# Altium PCB main.PcbDoc
Units mm, origin at the board's own origin, x right, y up, seen from the top; angles counter-clockwise.
Board outline 74.5 x 54 mm, 2 copper layers (Top Layer, Bottom Layer), stack 1.135 mm thick; 14 components, 9 nets, 38 pads, 2 vias.
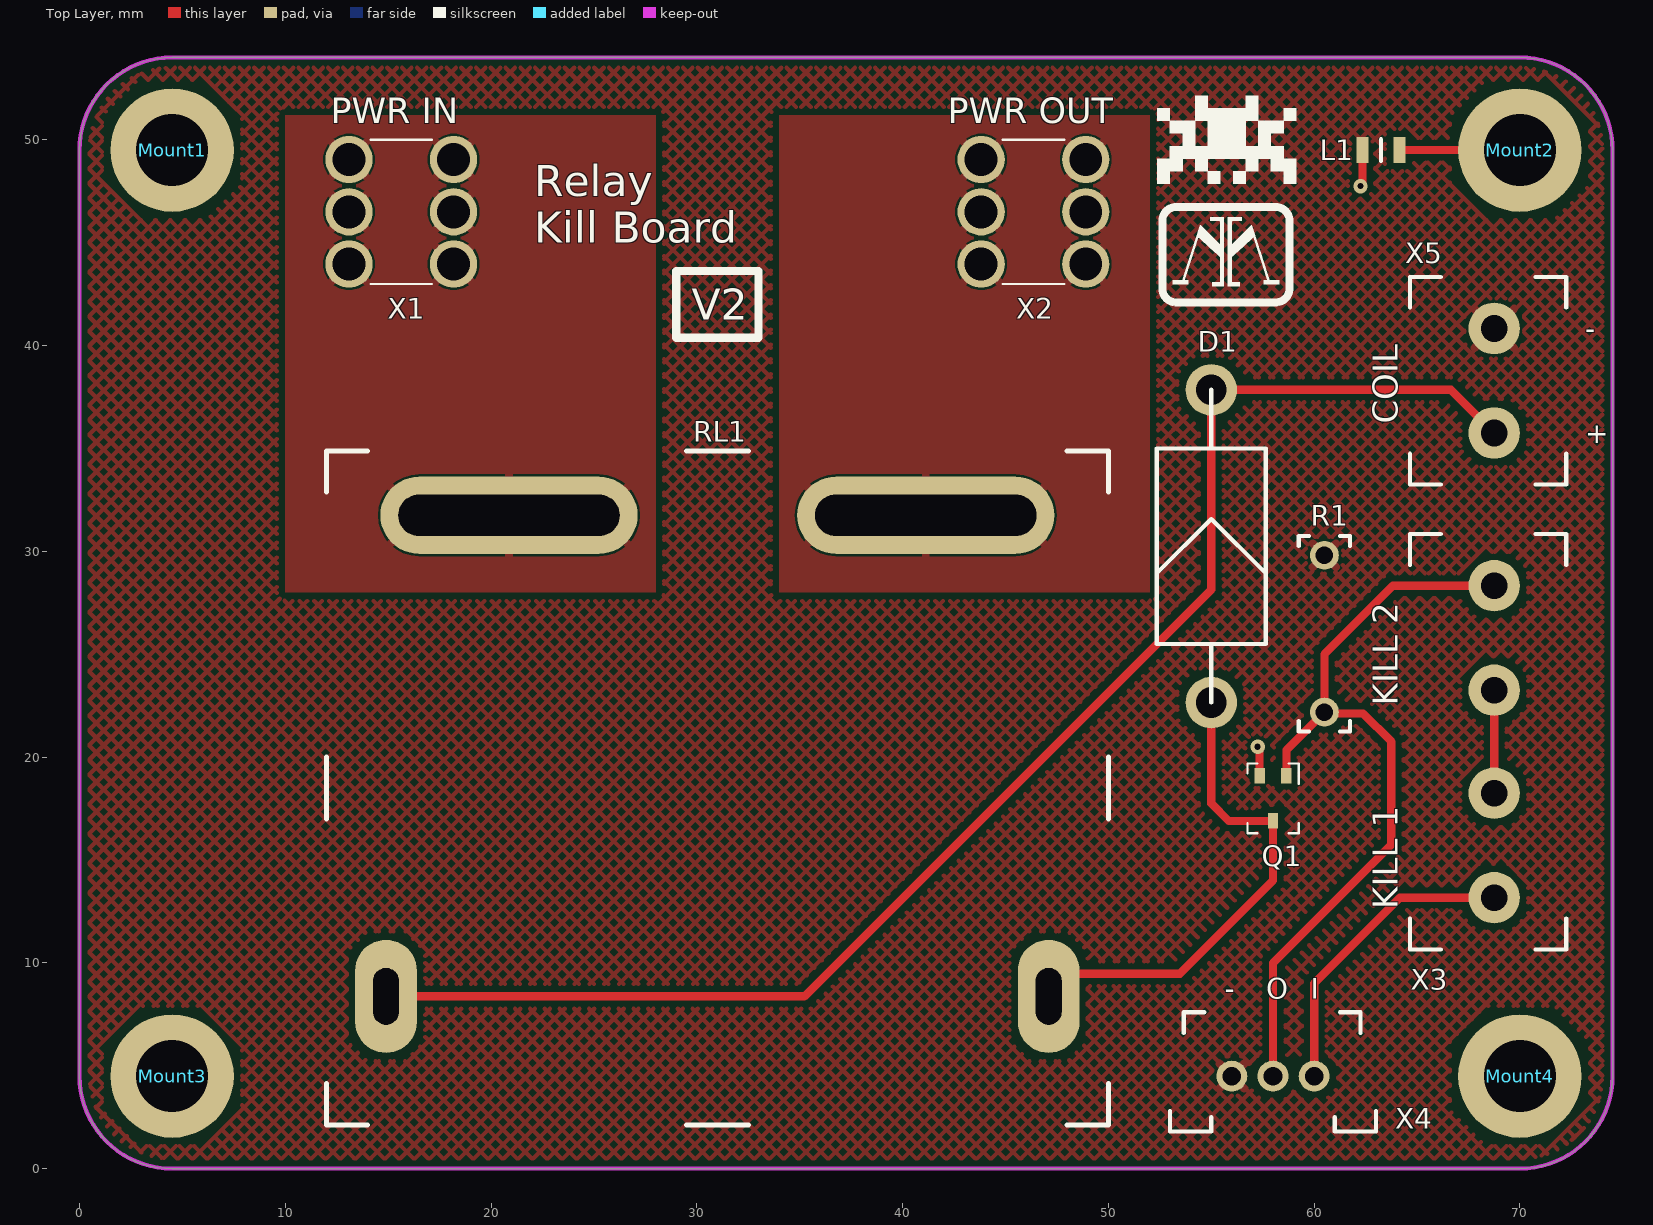
[diagram p0: Top Layer view]
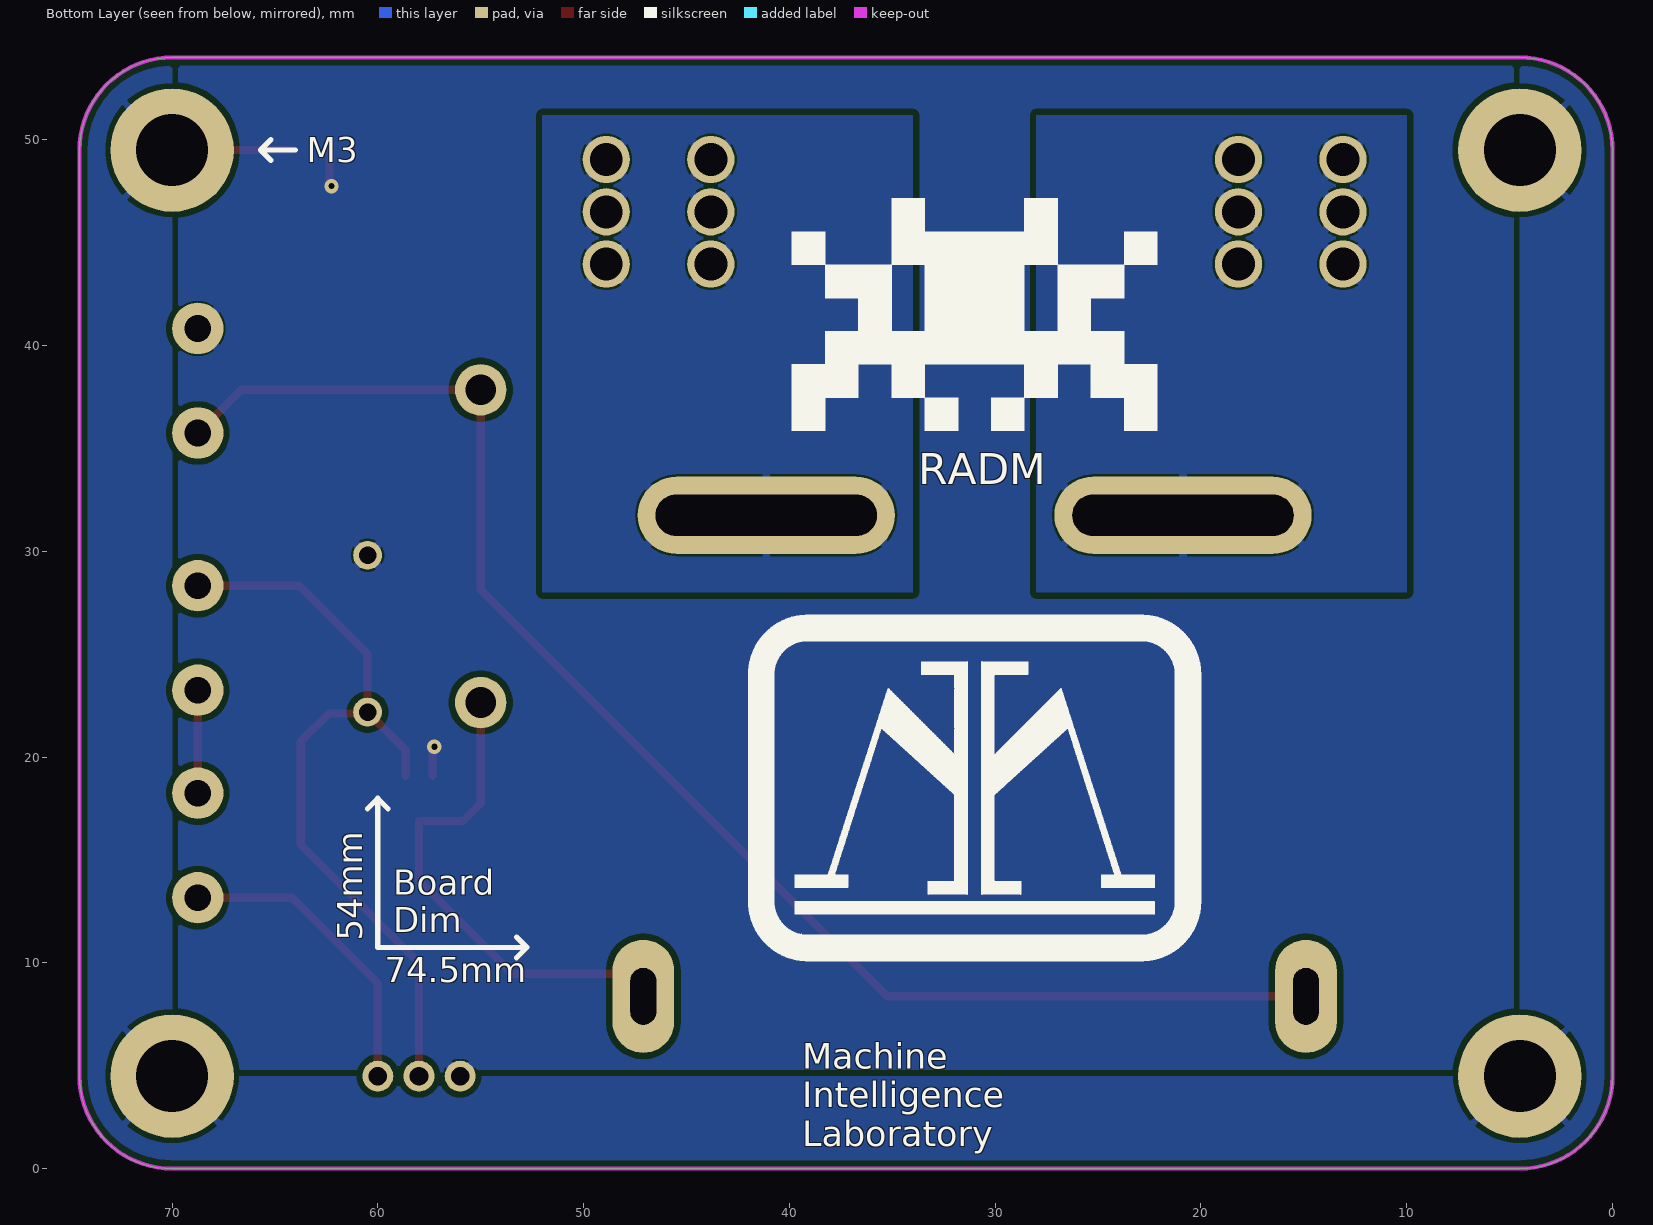
[diagram p1: Bottom Layer view, seen from below]

## Layer stack, top to bottom
Top Solder: solder mask 0.0102, Solder Resist, Dk 3.8
Top Layer: signal copper 0.035
Dielectric 1: dielectric 1.065, FR-4, Dk 4.8
Bottom Layer: signal copper 0.035
Bottom Solder: solder mask 0.0102, Solder Resist, Dk 3.8

## Board outline
4.5,0 cw(c4.5,4.5) 0,4.5 0,49.5 cw(c4.5,49.5) 4.5,54 70,54 cw(c70,49.5) 74.5,49.5 74.5,4.5 cw(c70,4.5) 70,0

## Design rules (kind name [scope] priority, off if disabled: settings)
BoardOutlineClearance [All] p1: gap=0.2 ignorepadtopadclearanceinfootprint=FALSE
Clearance "inPolygon Clearance" [InPolygon] p1: gap=0.3 ignorepadtopadclearanceinfootprint=TRUE // this rule ensures that every net within a polygon of a different net has a set clearance from the poly
Clearance "High Current Polygon Clearance" [(InPolygon AND InNetClass('High_Current_Nets'))] p2: gap=0 ignorepadtopadclearanceinfootprint=TRUE // this rule ensures that every net within a polygon of a different net has a set clearance from the poly
Clearance "Different Diff Pair" [All] p3: gap=0.2 ignorepadtopadclearanceinfootprint=TRUE
Clearance "Same Diff Pair" [All] p4: gap=0.1 ignorepadtopadclearanceinfootprint=TRUE
Clearance "Different Nets" [not InAnyDifferentialPair] p5: gap=0.3 ignorepadtopadclearanceinfootprint=TRUE except(0.1: Arc-SMDPad Arc-THPad Arc-Via Arc-Text Track-SMDPad Track-THPad Track-Via Track-Text SMDPad-Text THPad-Text Via-Text Fill-Text Poly-Text Region-Text Text-Text; 0.12: Arc-Arc Arc-Track Track-Track; 0.15: SMDPad-SMDPad SMDPad-THPad SMDPad-Via THPad-THPad THPad-Via Via-Via; 0.2: Arc-Hole Track-Hole SMDPad-Hole THPad-Hole Via-Hole Fill-Hole Poly-Hole Region-Hole Text-Hole)
Clearance "Same Net" [not InAnyDifferentialPair] p6: gap=0 ignorepadtopadclearanceinfootprint=TRUE except(0.1: THPad-Via; 0.18: Arc-Arc Arc-Track Track-Track)
ComponentClearance [All] p1: gap=0.102 collisioncheckmode=3 verticalgap=0.102 showdistances=TRUE
DiffPairsRouting "Ethernet Routing" [InDifferentialPairClass('Ethernet_Pairs')] p1: maxlimit=0.2 minlimit=0.2 mostfreqgap=0.2 toplayer_minwidth=0.25 toplayer_maxwidth=0.25 toplayer_prefwidth=0.25 bottomlayer_minwidth=0.25 bottomlayer_maxwidth=0.25 bottomlayer_prefwidth=0.25 impedanceprofiledriven=TRUE maxuncoupledlength=12.7
DiffPairsRouting "USB Routing" [InDifferentialPairClass('USB_Pairs')] p2: maxlimit=0.127 minlimit=0.127 mostfreqgap=0.127 toplayer_minwidth=0.23 toplayer_maxwidth=0.23 toplayer_prefwidth=0.23 bottomlayer_minwidth=0.23 bottomlayer_maxwidth=0.23 bottomlayer_prefwidth=0.23 maxuncoupledlength=12.7
DiffPairsRouting "CAN Routing" [InDifferentialPairClass('CAN_Pairs')] p3: maxlimit=0.5 minlimit=0.5 mostfreqgap=0.5 toplayer_minwidth=0.201 toplayer_maxwidth=0.201 toplayer_prefwidth=0.201 bottomlayer_minwidth=0.201 bottomlayer_maxwidth=0.201 bottomlayer_prefwidth=0.201 impedanceprofiledriven=TRUE maxuncoupledlength=12.7
Height [All] p1: minheight=0 maxheight=1816.048 prefheight=12.7
HoleSize [All] p1: absolutevalues=TRUE maxlimit=100 minlimit=0.3 maxpercent=80.000 minpercent=20.000
HoleToHoleClearance [All] p1: gap=0.25 allowstackedmicrovias=FALSE
MatchedLengths "XTAL Nets Matched Delays" [InNetClass('XTAL_Nets')] p1: tolerance=25.4 checknetsindiffpair=FALSE checkdiffpairvsdiffpair=TRUE checkxsignals=TRUE checkothers=TRUE usedelayunits=TRUE delaytolerance=10.000000
MatchedLengths "Diff Pair Matched Delays" [InDifferentialPairClass('Ethernet_Pairs') or InDifferentialPairClass('USB_Pairs') or InDifferentialPairClass('CAN_Pairs')] p2: tolerance=5 checknetsindiffpair=TRUE checkdiffpairvsdiffpair=FALSE checkxsignals=FALSE checkothers=FALSE usedelayunits=TRUE delaytolerance=100.000000 phasematching=TRUE phasedelaytolerance=5.000000 phasedistance=12.7
MinimumAnnularRing [All] p1: minimumring=0.2
MinimumSolderMaskSliver [All] p1: minsoldermaskwidth=0
PlaneClearance "Supply Net Clearance" [InNetClass('Supply_Nets')] p1: clearance=0.5
PlaneClearance "All Nets" [All] p2: clearance=0.3
PolygonConnect "High Current" [InNetClass('High_Current_Nets')] p1: thpad.connectstyle=Relief thpad.reliefconductorwidth=0.4 thpad.reliefentries=4 thpad.polygonreliefangle="90 Angle" thpad.airgapwidth=0.1 thpad.conductorbypadedge=TRUE thpad.mindistance=0.381 thpad.enablemindistance=FALSE smdpad.connectstyle=Direct smdpad.reliefconductorwidth=0.254 smdpad.reliefentries=4 smdpad.polygonreliefangle="90 Angle" smdpad.airgapwidth=0.254 via.connectstyle=Direct via.reliefconductorwidth=0.254 via.reliefentries=4 via.polygonreliefangle="90 Angle" via.airgapwidth=0.254
PolygonConnect "Supply Nets" [InNetClass('Supply_Nets')] p2: connectstyle=Relief reliefconductorwidth=0.3 reliefentries=4 polygonreliefangle="90 Angle" conductorbypadedge=TRUE mindistance=0.381 enablemindistance=FALSE airgapwidth=0.254
PolygonConnect General [All] p3: connectstyle=Relief reliefconductorwidth=0.254 reliefentries=4 polygonreliefangle="90 Angle" airgapwidth=0.254
RoutingVias [All] p1: holewidth=0.2 width=0.35 viastyle="Through Hole" minholewidth=0.15 minwidth=0.3 maxholewidth=6.3 maxwidth=6.55
SilkToSilkClearance [All] p1: silktosilkclearance=0
SilkToSolderMaskClearance [All] p1: minsilkscreentomaskgap=0 clearancetoexposedcopper=TRUE
SolderMaskExpansion [All] p1: expansion=0.075 istentingtop=FALSE
SupplyNets "Schematic Supply Nets_3" [InNet('GND')] p1: voltage=0.000
SupplyNets "Schematic Supply Nets_1" [InNet('Earth')] p2: voltage=0.000
UnRoutedNet [All] p1: checkbadconnections=TRUE
Width "nRF Width" [InNetClass('nRF Signal')] p1: maxlimit=0.379 minlimit=0.379 preferedwidth=0.379 impedanceprofiledriven=TRUE minimp=50.000000 maximp=50.000000 favimp=50.000000 checkconnectedcopper=TRUE
Width [All] p2: maxlimit=100 minlimit=0.1 preferedwidth=0.2
20 further rules are at their usual default settings.

## Classes and differential pairs
net class High_Current_Nets: GND NetD1_2 NetRL1_3 NetRL1_4 Relay_Coil_+ Relay_Kill_Output
net class Supply_Nets: Earth GND
component class Relay: D1 Q1 RL1 X1 X2 X3 X4 X5
component class Overview: L1 Mount1 Mount2 Mount3 Mount4

## Components (designator, comment, footprint, x,y, rotation, side; value= is the part's Value field where it differs from the comment)
D1 "1N5822" "[Diode] Thru-Hole" 55,30.25 r270 top
L1 "742792040" "[Ferrite] SMD Bead 0805 (2)" 63.25,49.5 r180 top
Mount1 "M3 Mount Hole" "[Mount] M3 Mount Hole" 4.5,49.5 r0 top
Mount2 "M3 Mount Hole" "[Mount] M3 Mount Hole" 70,49.5 r0 top
Mount3 "M3 Mount Hole" "[Mount] M3 Mount Hole" 4.5,4.5 r0 top
Mount4 "M3 Mount Hole" "[Mount] M3 Mount Hole" 70,4.5 r0 top
Q1 "[NMOS] SMD 20V 1.4A 160mOhm" SOT323 58,18 r270 top
R1 "[100k] Thru-Hole 1% 1/4W" "[Res] Thru-Hole 1/4W" 60.5,26 r270 top
RL1 "AZSR190-1A-24D" "[Relay] AZSR190-1A-24D" 31,18.5 r0 top
X1 "7461057" "[Port] Shank Connector (100A)" 15.64,46.5 r0 top
X2 "7461057" "[Port] Shank Connector (100A)" 46.36,46.5 r0 top
X3 "4pin Screw Terminal" "[Screw Terminal] 4pin 5mm" 68.75,20.75 r90 top
X4 "[Sherlock] 3pin" "[Sherlock] 3pin" 58,4.5 r180 top
X5 "2pin Screw Terminal" "[Screw Terminal] 2pin 5mm" 68.75,38.25 r90 top

## Footprints (in the part's own frame and the unit in brackets; to place one, negate y for a bottom-side part, rotate by r counter-clockwise, add the part's x,y. Pads: shape width x height; smd on the part's side, far side on the other; paste and mask are expansions set on the pad)
"[Diode] Thru-Hole" [mm] "1N5822"
  round 2.5 hole 1.5: 1(-7.6,0) 2(7.6,0)
  silkscreen extent -7.6,-2.66 7.6,2.65, body extent -8.27,-2.66 8.27,2.66, height 7.16
"[Ferrite] SMD Bead 0805 (2)" [mm] "742792040"
  rect 0.6x1.25 smd: 1(-0.9,0) 2(0.9,0)
  silkscreen extent 0,-0.53 0,0.53, body extent -1,-0.6 1,0.6, height 1.1
"[Mount] M3 Mount Hole" [mm]
  round 6 hole 3.5: 1(0,0)
"[Port] Shank Connector (100A)" [mm]
  round 2.3 hole 1.6: 1(-2.54,-2.54) 1(-2.54,0) 1(-2.54,2.54) 1(2.54,-2.54) 1(2.54,0) 1(2.54,2.54)
  silkscreen extent -1.5,-3.5 1.5,3.5, body extent -3.5,-3.5 3.5,3.5, height 6
"[Relay] AZSR190-1A-24D" [mm] "AZSR190-1A-24D"
  oval 3x5.5 hole 1.25 slot 2.75 at 90 deg: 1(-16.1,-10.125) 2(16.1,-10.125)
  oval 12.5x3.75 hole 2 slot 10.75 at 0 deg: 3(-10.125,13.25) 4(10.125,13.25)
  silkscreen extent -19,-16.38 19,16.38, body extent -19,-16.38 19,16.38, height 40
"[Res] Thru-Hole 1/4W" [mm]
  round 1.4 hole 0.85: 1(-3.81,0) 2(3.81,0)
  silkscreen extent -4.75,-1.25 4.75,1.25, body extent -4.11,-1.19 4.11,1.19, height 2.7
"[Screw Terminal] 2pin 5mm" [mm]
  round 2.5 hole 1.3: 1(-2.5,0) 2(2.58,0)
  silkscreen extent -5.01,-3.5 5.09,4.1, body extent -5.45,-3.5 5.05,4.1, height 9.99
"[Screw Terminal] 4pin 5mm" [mm]
  round 2.5 hole 1.3: 1(-7.58,0) 2(-2.5,0) 3(2.5,0) 4(7.58,0)
  silkscreen extent -10.09,-3.5 10.09,4.1, body extent -10.53,-3.5 10.09,4.1, height 9.99
"[Sherlock] 3pin" [mm]
  round 1.5 hole 0.9: 1(-2,0) 2(0,0) 3(2,0)
  silkscreen extent -5,-3.1 5,2.7, body extent -4.81,-2.97 4.89,2.58, height 8.5
SOT323 [mm]
  rect 0.75x0.5 smd: 1(-1.1,0.65) 2(-1.1,-0.65) 3(1.1,0)
  silkscreen extent -1.7,-1.25 1.7,1.25, body extent -1.05,-1 1.05,1, height 1

## Part data
D1: library part "[Schottky] Thru-Hole 40V 3A", Supplier Part Number 1=1N5822GOS-ND, Supplier 1=DigiKey
L1: library part "[Ferrite] SMD Ferrite Bead (2)", Supplier Part Number 1=732-1620-1-ND, Supplier 1=DigiKey
Mount1 Mount2 Mount3 Mount4: library part "[Mount] M3 Mount Hole", "Place at least 4.5mm from board edge. Plated."
Q1: "BSS816NWH6327XTSA1", Supplier Part Number 1=BSS816NWH6327XTSA1CT-ND, Supplier 1=DigiKey
R1: "MFR-25FTF52-100K", Resistance=100k, Size Package=Thru-Hole, Supplier Part Number 1=13-MFR-25FTF52-100KCT-ND, Tolerance=1%, Supplier 1=DigiKey, Wattage=1/4W
RL1: library part "[Relay] AZSR190-1A-24D", Supplier Part Number 1=3385-AZSR190-1A-24D-ND, Supplier 1=DigiKey
X1 X2: library part "[Port] Shank Connector (100A)", "7461057, internal thread", Supplier Part Number 1=732-7461057-ND, Supplier 1=DigiKey
X3: library part "[Screw Terminal] 4pin", "TB002-500-04BE", Supplier Part Number 1=102-6147-ND, Supplier 1=DigiKey
X4: "0353620350", Supplier Part Number 1=WM18921-ND, Supplier 1=DigiKey
X5: library part "[Screw Terminal] 2pin", "TB002-500-02BE", Supplier Part Number 1=102-6145-ND, Supplier 1=DigiKey

## Via types
v1: diameter 0.7, hole 0.3, Top Layer to Bottom Layer, 2 vias

## Nets (pads, with @x,y where several pads share a name; then routed paths per layer and width w, separated by ;. In a path a pad name is that pad's centre, name@x,y a point inside that pad or via, vN(x,y) a via of type N, cw(c..) or ccw(c..) an arc to the next point about the centre after c; other vN are vias at no path point)
Earth: L1.1 Mount1.1 Mount2.1 Mount3.1 Mount4.1 | length 5.8
  Top Layer w0.4: L1.1 Mount2.1
GND: L1.2 Q1.2 R1.1 X4.3 X5.2 | length 3.2
  Top Layer w0.4: v1(57.25,20.5) 57.25,20.419 57.35,20.319 Q1.2 ; v1(62.25,47.75) 62.25,47.831 62.35,47.931 L1.2
NetD1_2: D1.2 Q1.3 RL1.2 | length 24.4
  Top Layer w0.4: RL1.2 48.2,9.475 53.475,9.475 58,14 Q1.3 55.85,16.9 55,17.75 D1.2
NetRL1_3: RL1.3 X1.1
NetRL1_4: RL1.4 X2.1
NetX3_2: X3.2 X3.3 | length 5
  Top Layer w0.4: X3.2 X3.3
Relay_Coil_+: D1.1 RL1.1 X5.1 | length 72.6
  Top Layer w0.4: RL1.1 35.225,8.375 55,28.15 D1.1 66.65,37.85 X5.1
Relay_Kill_Input: X3.1 X4.1 | length 15
  Top Layer w0.4: X4.1 60,9 64.17,13.17 X3.1
Relay_Kill_Output: Q1.1 R1.2 X3.4 X4.2 | length 38.8
  Top Layer w0.4: X4.2 58,10 63.75,15.75 63.75,20.75 62.379,22.121 60.569,22.121 R1.2 ; Q1.1 58.65,20.34 R1.2 ; X3.4 63.83,28.33 60.5,25 R1.2

## Polygon pours and split planes (outlines as drawn)
GND on Top Layer "GND Top Poly" (hatched 45Degree grid 0.508 track 0.203, remove dead copper, pour order 5): 0,0 74.5,0 74.5,54 0,54
NetRL1_4 on Top Layer "Relay OUT Top Poly" (solid, remove dead copper, pour order 2): 52,51.19 52,28 34,28 34,51.19
NetRL1_3 on Top Layer "Relay IN Top Poly" (solid, remove dead copper, pour order 0): 10,51.19 10,28 28,28 28,51.19
GND on Bottom Layer "GND Bottom Poly" (solid, remove dead copper, pour order 6): 0,0 74.5,0 74.5,54 0,54
Earth on Bottom Layer "Earth Poly" (solid, remove dead copper, pour order 4): 0,54 4.5,54 4.5,4.5 70,4.5 70,54 74.5,54 74.5,0 0,0
NetRL1_4 on Bottom Layer "Relay OUT Bottom Poly" (solid, remove dead copper, pour order 3): 52,51.19 52,28 34,28 34,51.19
NetRL1_3 on Bottom Layer "Relay IN Bottom Poly" (solid, remove dead copper, pour order 1): 10,51.19 10,28 28,28 28,51.19

## Keep-outs
Keep-Out Layer:
  the board outline again, w0.2

## Silkscreen, mask and mechanical layers (free items; w line width, h text height)
Top Overlay:
  drawing of 12 lines, arcs and shapes, not listed
  text "PWR IN" at 12.204,50.8 h1.25
  text "PWR OUT" at 42.195,50.8 h1.25
  text "Relay / Kill Board" at 22.103,45 h1.5
  text "V2" at 29.75,41.25 h1.5
  text "-" at 73.167,40.33 h1
  text "COIL" at 64.05,36.191 h1.2 r90
  text "+" at 73.167,35.25 h1
  text "KILL 2" at 64.05,22.491 h1.2 r90
  text "KILL 1" at 64.05,12.611 h1.2 r90
  text "-" at 55.667,8.25 h1
  text "O" at 57.667,8.25 h1
  text "I" at 59.833,8.25 h1
Bottom Overlay:
  drawing of 18 lines, arcs and shapes, not listed
  text "M3" at 63.45,48.9 h1.2
  text "RADM" at 33.749,33.25 h1.5
  text "Board" at 59.25,13.3 h1.2
  text "Dim" at 59.25,11.5 h1.2
  text "54mm" at 60.75,11.076 h1.2 r270
  text "74.5mm" at 59.674,9.05 h1.2
  text "Machine / Intelligence / Laboratory" at 39.372,1.101 h1.25
Poly Planning:
  lines w0.2: 0,0 74.5,0 74.5,54 70,54 70,4.5 4.5,4.5 4.5,54 0,54 0,0 ; 10,28 10,51.19 28,51.19 28,28 10,28 ; 34,28 34,51.19 52,51.19 52,28 34,28